# Altium PCB PCB_CONTROL.PcbDoc (part 10 of 15)
Units mil, origin at the board's own origin, x right, y up, seen from the top; angles counter-clockwise.
Board outline 7360.03 x 4773.15 mil, 2 copper layers (Top Layer, Bottom Layer); 73 components, 135 nets, 396 pads, 106 vias.
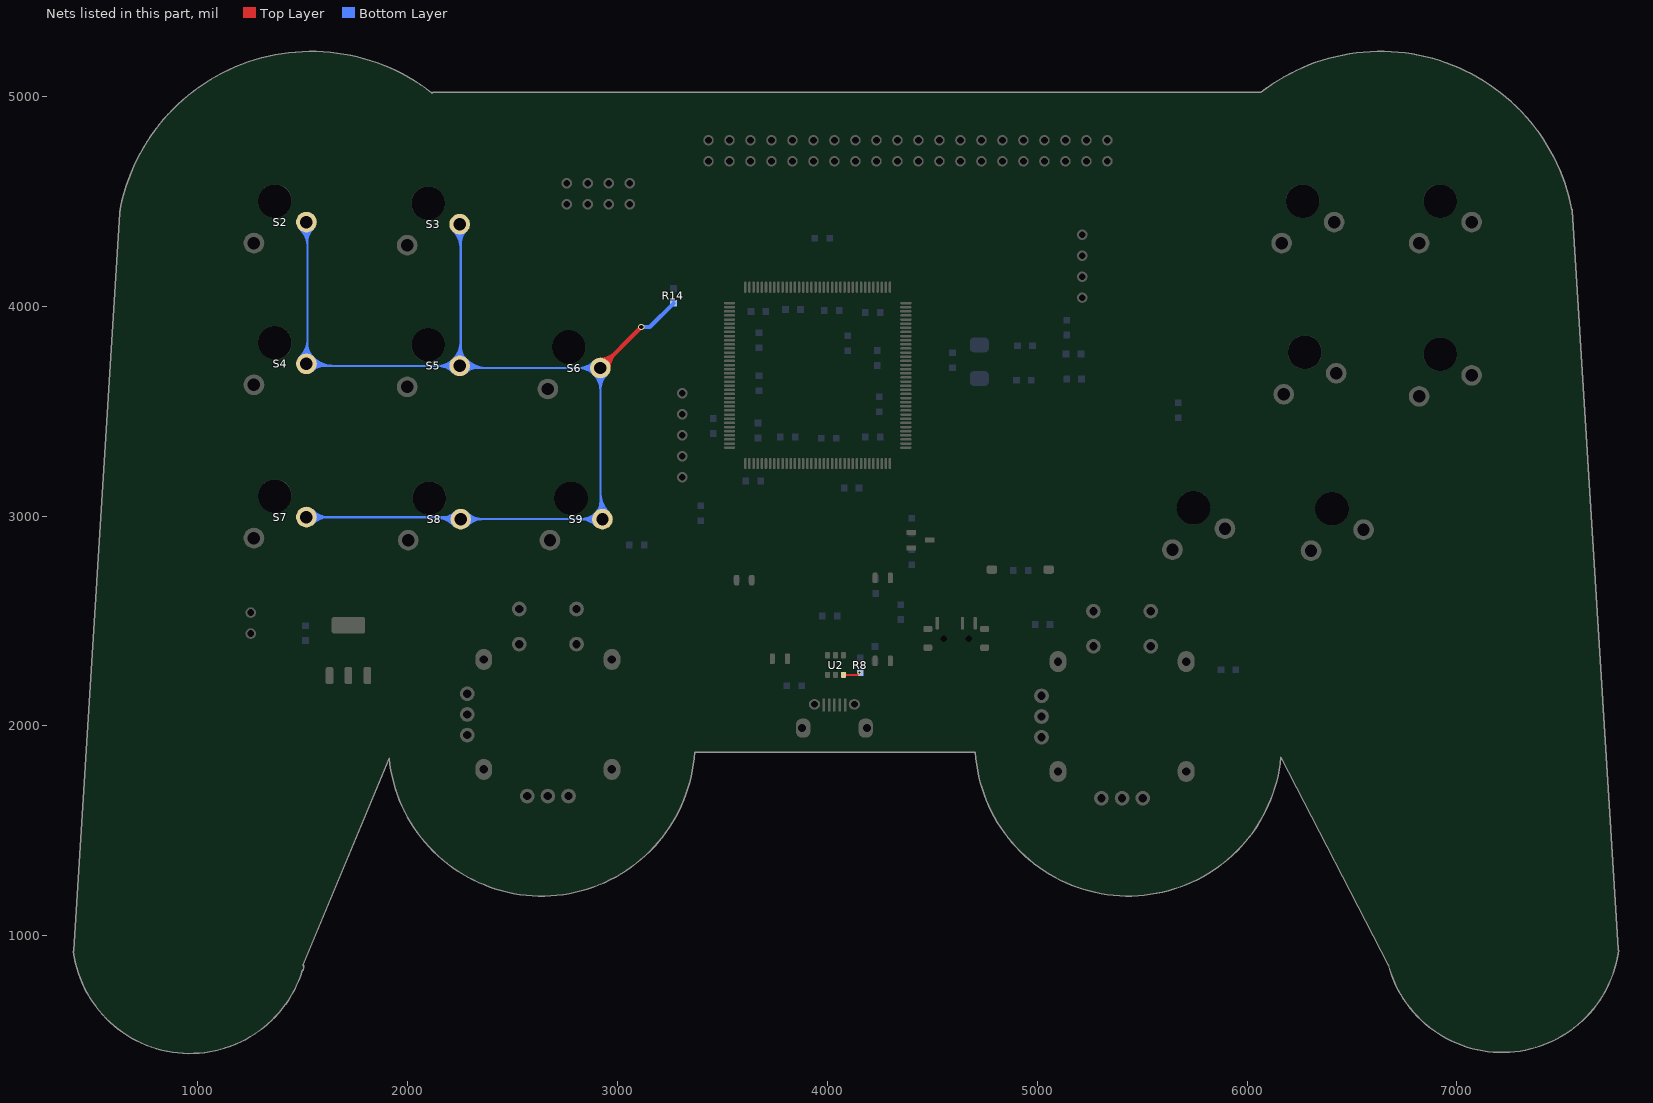
[diagram p10: the nets of this part, all layers, seen from the top]

## Via types
v1: diameter 20, hole 10, Top Layer to Bottom Layer, 104 vias
v2: diameter 30, hole 20, Top Layer to Bottom Layer, 2 vias

## Nets (pads, with @x,y where several pads share a name; then routed paths per layer and width w, separated by ;. In a path a pad name is that pad's centre, name@x,y a point inside that pad or via, vN(x,y) a via of type N, cw(c..) or ccw(c..) an arc to the next point about the centre after c; other vN are vias at no path point) (continued)
NetR8_1: R8.1 U2.6 | length 1735.2
  Top Layer w10: U2.6@4078,2243 4143,2243 ; U2.6@4078,2243 4090.53,2242.42 ; U2.6@4078,2243 4090.53,2243.58 ; U2.6@4078,2243 4090.53,2242.42 ; U2.6@4078,2243 4090.53,2243.58 ; U2.6@4082.95,2238.05 cw(c4094.9,2226.1) 4094.9,2243 ; U2.6@4082.95,2238.05 cw(c4094.9,2226.1) 4094.9,2243 ; U2.6@4082.95,2238.05 cw(c4094.9,2226.1) 4094.9,2243 ; U2.6@4082.95,2238.05 cw(c4094.9,2226.1) 4094.9,2243 ; U2.6@4082.95,2238.05 cw(c4094.9,2226.1) 4094.9,2243 ; U2.6@4082.95,2238.05 cw(c4094.9,2226.1) 4094.9,2243 ; U2.6@4082.95,2238.05 cw(c4094.9,2226.1) 4094.9,2243 ; U2.6@4082.95,2238.05 cw(c4094.9,2226.1) 4094.9,2243 ; U2.6@4082.95,2238.05 cw(c4094.9,2226.1) 4094.9,2243 ; U2.6@4082.95,2238.05 cw(c4094.9,2226.1) 4094.9,2243 ; U2.6@4082.95,2247.95 ccw(c4094.9,2259.9) 4094.9,2243 ; U2.6@4082.95,2247.95 ccw(c4094.9,2259.9) 4094.9,2243 ; U2.6@4082.95,2247.95 ccw(c4094.9,2259.9) 4094.9,2243 ; U2.6@4082.95,2247.95 ccw(c4094.9,2259.9) 4094.9,2243 ; U2.6@4082.95,2247.95 ccw(c4094.9,2259.9) 4094.9,2243 ; U2.6@4082.95,2247.95 ccw(c4094.9,2259.9) 4094.9,2243 ; U2.6@4082.95,2247.95 ccw(c4094.9,2259.9) 4094.9,2243 ; U2.6@4082.95,2247.95 ccw(c4094.9,2259.9) 4094.9,2243 ; U2.6@4082.95,2247.95 ccw(c4094.9,2259.9) 4094.9,2243 ; U2.6@4082.95,2247.95 ccw(c4094.9,2259.9) 4094.9,2243 ; U2.6@4083.78,2239.06 cw(c4090.17,2234.7) 4090.53,2242.42 ; U2.6@4083.78,2239.06 cw(c4090.17,2234.7) 4090.53,2242.42 ; U2.6@4083.78,2239.06 cw(c4090.17,2234.7) 4090.53,2242.42 ; U2.6@4083.78,2239.06 cw(c4090.17,2234.7) 4090.53,2242.42 ; U2.6@4083.78,2239.06 cw(c4090.17,2234.7) 4090.53,2242.42 ; U2.6@4083.78,2239.06 cw(c4090.17,2234.7) 4090.53,2242.42 ; U2.6@4083.78,2239.06 cw(c4090.17,2234.7) 4090.53,2242.42 ; U2.6@4083.78,2239.06 cw(c4090.17,2234.7) 4090.53,2242.42 ; U2.6@4083.78,2239.06 cw(c4090.17,2234.7) 4090.53,2242.42 ; U2.6@4083.78,2239.06 cw(c4090.17,2234.7) 4090.53,2242.42 ; U2.6@4083.78,2239.06 cw(c4090.17,2234.7) 4090.53,2242.42 ; U2.6@4083.78,2239.06 cw(c4090.17,2234.7) 4090.53,2242.42 ; U2.6@4083.78,2239.06 cw(c4090.17,2234.7) 4090.53,2242.42 ; U2.6@4083.78,2239.06 cw(c4090.17,2234.7) 4090.53,2242.42 ; U2.6@4083.78,2239.06 cw(c4090.17,2234.7) 4090.53,2242.42 ; U2.6@4083.78,2239.06 cw(c4090.17,2234.7) 4090.53,2242.42 ; U2.6@4083.78,2246.94 ccw(c4090.17,2251.3) 4090.53,2243.58 ; U2.6@4083.78,2246.94 ccw(c4090.17,2251.3) 4090.53,2243.58 ; U2.6@4083.78,2246.94 ccw(c4090.17,2251.3) 4090.53,2243.58 ; U2.6@4083.78,2246.94 ccw(c4090.17,2251.3) 4090.53,2243.58 ; U2.6@4083.78,2246.94 ccw(c4090.17,2251.3) 4090.53,2243.58 ; U2.6@4083.78,2246.94 ccw(c4090.17,2251.3) 4090.53,2243.58 ; U2.6@4083.78,2246.94 ccw(c4090.17,2251.3) 4090.53,2243.58 ; U2.6@4083.78,2246.94 ccw(c4090.17,2251.3) 4090.53,2243.58 ; U2.6@4083.78,2246.94 ccw(c4090.17,2251.3) 4090.53,2243.58 ; U2.6@4083.78,2246.94 ccw(c4090.17,2251.3) 4090.53,2243.58 ; U2.6@4083.78,2246.94 ccw(c4090.17,2251.3) 4090.53,2243.58 ; U2.6@4083.78,2246.94 ccw(c4090.17,2251.3) 4090.53,2243.58 ; U2.6@4083.78,2246.94 ccw(c4090.17,2251.3) 4090.53,2243.58 ; U2.6@4083.78,2246.94 ccw(c4090.17,2251.3) 4090.53,2243.58 ; U2.6@4083.78,2246.94 ccw(c4090.17,2251.3) 4090.53,2243.58 ; U2.6@4083.78,2246.94 ccw(c4090.17,2251.3) 4090.53,2243.58 ; U2.6@4084.12,2239.6 cw(c4090.88,2235.85) 4090.53,2243.58 ; U2.6@4084.12,2239.6 cw(c4090.88,2235.85) 4090.53,2243.58 ; U2.6@4084.12,2239.6 cw(c4090.88,2235.85) 4090.53,2243.58 ; U2.6@4084.12,2239.6 cw(c4090.88,2235.85) 4090.53,2243.58 ; U2.6@4084.12,2239.6 cw(c4090.88,2235.85) 4090.53,2243.58 ; U2.6@4084.12,2239.6 cw(c4090.88,2235.85) 4090.53,2243.58 ; U2.6@4084.12,2239.6 cw(c4090.88,2235.85) 4090.53,2243.58 ; U2.6@4084.12,2239.6 cw(c4090.88,2235.85) 4090.53,2243.58 ; U2.6@4084.12,2239.6 cw(c4090.88,2235.85) 4090.53,2243.58 ; U2.6@4084.12,2239.6 cw(c4090.88,2235.85) 4090.53,2243.58 ; U2.6@4084.12,2239.6 cw(c4090.88,2235.85) 4090.53,2243.58 ; U2.6@4084.12,2239.6 cw(c4090.88,2235.85) 4090.53,2243.58 ; U2.6@4084.12,2239.6 cw(c4090.88,2235.85) 4090.53,2243.58 ; U2.6@4084.12,2239.6 cw(c4090.88,2235.85) 4090.53,2243.58 ; U2.6@4084.12,2239.6 cw(c4090.88,2235.85) 4090.53,2243.58 ; U2.6@4084.12,2239.6 cw(c4090.88,2235.85) 4090.53,2243.58 ; U2.6@4084.12,2246.4 ccw(c4090.88,2250.15) 4090.53,2242.42 ; U2.6@4084.12,2246.4 ccw(c4090.88,2250.15) 4090.53,2242.42 ; U2.6@4084.12,2246.4 ccw(c4090.88,2250.15) 4090.53,2242.42 ; U2.6@4084.12,2246.4 ccw(c4090.88,2250.15) 4090.53,2242.42 ; U2.6@4084.12,2246.4 ccw(c4090.88,2250.15) 4090.53,2242.42 ; U2.6@4084.12,2246.4 ccw(c4090.88,2250.15) 4090.53,2242.42 ; U2.6@4084.12,2246.4 ccw(c4090.88,2250.15) 4090.53,2242.42 ; U2.6@4084.12,2246.4 ccw(c4090.88,2250.15) 4090.53,2242.42 ; U2.6@4084.12,2246.4 ccw(c4090.88,2250.15) 4090.53,2242.42 ; U2.6@4084.12,2246.4 ccw(c4090.88,2250.15) 4090.53,2242.42 ; U2.6@4084.12,2246.4 ccw(c4090.88,2250.15) 4090.53,2242.42 ; U2.6@4084.12,2246.4 ccw(c4090.88,2250.15) 4090.53,2242.42 ; U2.6@4084.12,2246.4 ccw(c4090.88,2250.15) 4090.53,2242.42 ; U2.6@4084.12,2246.4 ccw(c4090.88,2250.15) 4090.53,2242.42 ; U2.6@4084.12,2246.4 ccw(c4090.88,2250.15) 4090.53,2242.42 ; U2.6@4084.12,2246.4 ccw(c4090.88,2250.15) 4090.53,2242.42 ; 4090.53,2242.42 4080.26,2249.62 4090.53,2242.42 ; 4090.53,2242.42 4079.64,2236.2 4090.53,2242.42 ; 4090.53,2243.58 4079.64,2249.8 4090.53,2243.58 ; 4090.53,2243.58 4080.26,2236.38 4090.53,2243.58 ; 4143,2243 v1(4155,2255) ; 4143,2243 v1(4155,2255) ; 4143,2243 v1(4155,2255) ; 4143,2243 v1(4155,2255) ; 4146.46,2246.46 cw(c4155,2237.93) v1@4155,2250 ; 4146.46,2246.46 ccw(c4137.93,2255) v1@4150,2255 ; 4146.46,2246.46 cw(c4155,2237.93) v1@4155,2250 ; 4146.46,2246.46 ccw(c4137.93,2255) v1@4150,2255 ; 4146.46,2246.46 cw(c4155,2237.93) v1@4155,2250 ; 4146.46,2246.46 ccw(c4137.93,2255) v1@4150,2255 ; 4146.46,2246.46 cw(c4155,2237.93) v1@4155,2250 ; 4146.46,2246.46 ccw(c4137.93,2255) v1@4150,2255 ; 4146.46,2246.46 ccw(c4137.93,2255) v1@4150,2255 ; 4146.46,2246.46 cw(c4155,2237.93) v1@4155,2250 ; 4146.46,2246.46 ccw(c4137.93,2255) v1@4150,2255 ; 4146.46,2246.46 cw(c4155,2237.93) v1@4155,2250 ; 4146.46,2246.46 ccw(c4137.93,2255) v1@4150,2255 ; 4146.46,2246.46 cw(c4155,2237.93) v1@4155,2250 ; 4146.46,2246.46 ccw(c4137.93,2255) v1@4150,2255 ; 4146.46,2246.46 cw(c4155,2237.93) v1@4155,2250 ; 4146.46,2246.46 ccw(c4137.93,2255) v1@4150,2255 ; 4146.46,2246.46 cw(c4155,2237.93) v1@4155,2250 ; 4146.46,2246.46 ccw(c4137.93,2255) v1@4150,2255 ; 4146.46,2246.46 cw(c4155,2237.93) v1@4155,2250 ; 4146.46,2246.46 ccw(c4137.93,2255) v1@4150,2255 ; 4146.46,2246.46 cw(c4155,2237.93) v1@4155,2250 ; 4146.46,2246.46 ccw(c4137.93,2255) v1@4150,2255 ; 4146.46,2246.46 cw(c4155,2237.93) v1@4155,2250 ; 4146.46,2246.46 ccw(c4137.93,2255) v1@4150,2255 ; 4146.46,2246.46 cw(c4155,2237.93) v1@4155,2250 ; 4146.46,2246.46 ccw(c4137.93,2255) v1@4150,2255 ; 4146.46,2246.46 cw(c4155,2237.93) v1@4155,2250 ; 4146.46,2246.46 ccw(c4137.93,2255) v1@4150,2255 ; 4146.46,2246.46 cw(c4155,2237.93) v1@4155,2250 ; 4146.46,2246.46 ccw(c4137.93,2255) v1@4150,2255 ; 4146.46,2246.46 cw(c4155,2237.93) v1@4155,2250 ; 4146.46,2246.46 ccw(c4137.93,2255) v1@4150,2255 ; 4146.46,2246.46 cw(c4155,2237.93) v1@4155,2250 ; 4146.46,2246.46 ccw(c4137.93,2255) v1@4150,2255 ; 4146.46,2246.46 cw(c4155,2237.93) v1@4155,2250 ; 4146.46,2246.46 ccw(c4137.93,2255) v1@4150,2255 ; 4146.46,2246.46 cw(c4155,2237.93) v1@4155,2250 ; 4146.46,2246.46 ccw(c4137.93,2255) v1@4150,2255 ; 4146.46,2246.46 cw(c4155,2237.93) v1@4155,2250 ; 4146.46,2246.46 ccw(c4137.93,2255) v1@4150,2255 ; 4146.46,2246.46 cw(c4155,2237.93) v1@4155,2250 ; 4146.46,2246.46 ccw(c4137.93,2255) v1@4150,2255 ; 4146.46,2246.46 cw(c4155,2237.93) v1@4155,2250 ; 4146.46,2246.46 ccw(c4137.93,2255) v1@4150,2255 ; 4146.46,2246.46 cw(c4155,2237.93) v1@4155,2250 ; 4146.46,2246.46 ccw(c4137.93,2255) v1@4150,2255 ; 4146.46,2246.46 cw(c4155,2237.93) v1@4155,2250 ; 4146.46,2246.46 ccw(c4137.93,2255) v1@4150,2255 ; 4146.46,2246.46 cw(c4155,2237.93) v1@4155,2250 ; 4146.46,2246.46 ccw(c4137.93,2255) v1@4150,2255 ; 4146.46,2246.46 cw(c4155,2237.93) v1@4155,2250 ; 4146.46,2246.46 ccw(c4137.93,2255) v1@4150,2255 ; 4146.46,2246.46 cw(c4155,2237.93) v1@4155,2250 ; 4146.46,2246.46 ccw(c4137.93,2255) v1@4150,2255 ; 4146.46,2246.46 cw(c4155,2237.93) v1@4155,2250 ; 4146.46,2246.46 ccw(c4137.93,2255) v1@4150,2255 ; 4146.46,2246.46 cw(c4155,2237.93) v1@4155,2250 ; 4146.46,2246.46 ccw(c4137.93,2255) v1@4150,2255 ; 4146.46,2246.46 cw(c4155,2237.93) v1@4155,2250 ; 4146.46,2246.46 ccw(c4137.93,2255) v1@4150,2255 ; 4146.46,2246.46 cw(c4155,2237.93) v1@4155,2250 ; 4146.46,2246.46 ccw(c4137.93,2255) v1@4150,2255 ; 4146.46,2246.46 cw(c4155,2237.93) v1@4155,2250 ; 4146.46,2246.46 ccw(c4137.93,2255) v1@4150,2255 ; 4146.46,2246.46 cw(c4155,2237.93) v1@4155,2250 ; 4146.46,2246.46 ccw(c4137.93,2255) v1@4150,2255 ; 4146.46,2246.46 cw(c4155,2237.93) v1@4155,2250 ; 4146.46,2246.46 ccw(c4137.93,2255) v1@4150,2255 ; 4146.46,2246.46 cw(c4155,2237.93) v1@4155,2250 ; 4146.46,2246.46 ccw(c4137.93,2255) v1@4150,2255 ; 4146.46,2246.46 cw(c4155,2237.93) v1@4155,2250
NetR14_1: R14.1 S2.1 S3.1 S4.1 S5.1 S6.1 S7.1 S8.1 S9.1 | length 47335.3
  Top Layer w20: S6.1@2920,3705 v2(3115,3900) ; S6.1@2919.23,3705.16 cw(c2985.75,3691.54) 2968.17,3757.12 ; S6.1@2919.23,3705.16 cw(c2985.75,3691.54) 2968.17,3757.12 ; S6.1@2919.23,3705.16 cw(c2985.75,3691.54) 2968.17,3757.12 ; S6.1@2919.23,3705.16 cw(c2985.75,3691.54) 2968.17,3757.12 ; S6.1@2919.23,3705.16 cw(c2985.75,3691.54) 2968.17,3757.12 ; S6.1@2919.23,3705.16 cw(c2985.75,3691.54) 2968.17,3757.12 ; S6.1@2920,3744.21 ccw(c2920,3838.88) 2986.94,3771.94 ; S6.1@2920,3744.21 ccw(c2920,3838.88) 2986.94,3771.94 ; S6.1@2920,3744.21 ccw(c2920,3838.88) 2986.94,3771.94 ; S6.1@2920,3744.21 ccw(c2920,3838.88) 2986.94,3771.94 ; S6.1@2920.16,3704.23 ccw(c2906.54,3770.75) 2972.12,3753.17 ; S6.1@2920.16,3704.23 ccw(c2906.54,3770.75) 2972.12,3753.17 ; S6.1@2920.16,3704.23 ccw(c2906.54,3770.75) 2972.12,3753.17 ; S6.1@2920.16,3704.23 ccw(c2906.54,3770.75) 2972.12,3753.17 ; S6.1@2920.16,3704.23 ccw(c2906.54,3770.75) 2972.12,3753.17 ; S6.1@2920.16,3704.23 ccw(c2906.54,3770.75) 2972.12,3753.17 ; S6.1@2959.21,3705 cw(c3053.88,3705) 2986.94,3771.94 ; S6.1@2959.21,3705 cw(c3053.88,3705) 2986.94,3771.94 ; S6.1@2959.21,3705 cw(c3053.88,3705) 2986.94,3771.94 ; S6.1@2959.21,3705 cw(c3053.88,3705) 2986.94,3771.94
  Bottom Layer w10: S7.1@1521,2994 2246,2994 S8.1@2255,2985 S9.1@2930,2985 2920,2995 S6.1@2920,3705 S5.1@2260,3705 ; S4.1@1525,3725 S2.1@1525,4395 ; S4.1@1530,3715 S5.1@2250,3715 ; S5.1@2255,3715 S3.1@2255,4385 ; S4.1@1488.74,3756.26 ccw(c1401.19,3843.81) 1525,3843.81 ; S4.1@1488.74,3756.26 ccw(c1401.19,3843.81) 1525,3843.81 ; S4.1@1488.74,3756.26 ccw(c1401.19,3843.81) 1525,3843.81 ; S4.1@1488.74,3756.26 ccw(c1401.19,3843.81) 1525,3843.81 ; S4.1@1488.74,3756.26 ccw(c1401.19,3843.81) 1525,3843.81 ; S4.1@1488.74,3756.26 ccw(c1401.19,3843.81) 1525,3843.81 ; S4.1@1488.74,3756.26 ccw(c1401.19,3843.81) 1525,3843.81 ; S4.1@1488.74,3756.26 ccw(c1401.19,3843.81) 1525,3843.81 ; S2.1@1488.74,4368.74 cw(c1401.19,4281.19) 1525,4281.19 ; S2.1@1488.74,4368.74 cw(c1401.19,4281.19) 1525,4281.19 ; S2.1@1488.74,4368.74 cw(c1401.19,4281.19) 1525,4281.19 ; S2.1@1488.74,4368.74 cw(c1401.19,4281.19) 1525,4281.19 ; S2.1@1488.74,4368.74 cw(c1401.19,4281.19) 1525,4281.19 ; S2.1@1488.74,4368.74 cw(c1401.19,4281.19) 1525,4281.19 ; S2.1@1488.74,4368.74 cw(c1401.19,4281.19) 1525,4281.19 ; S2.1@1488.74,4368.74 cw(c1401.19,4281.19) 1525,4281.19 ; S4.1@1495.81,3749.19 ccw(c1425.33,3819.67) 1525,3819.67 ; S4.1@1495.81,3749.19 ccw(c1425.33,3819.67) 1525,3819.67 ; S4.1@1495.81,3749.19 ccw(c1425.33,3819.67) 1525,3819.67 ; S4.1@1495.81,3749.19 ccw(c1425.33,3819.67) 1525,3819.67 ; S4.1@1495.81,3749.19 ccw(c1425.33,3819.67) 1525,3819.67 ; S4.1@1495.81,3749.19 ccw(c1425.33,3819.67) 1525,3819.67 ; S4.1@1495.81,3749.19 ccw(c1425.33,3819.67) 1525,3819.67 ; S4.1@1495.81,3749.19 ccw(c1425.33,3819.67) 1525,3819.67 ; S2.1@1495.81,4375.81 cw(c1425.33,4305.33) 1525,4305.33 ; S2.1@1495.81,4375.81 cw(c1425.33,4305.33) 1525,4305.33 ; S2.1@1495.81,4375.81 cw(c1425.33,4305.33) 1525,4305.33 ; S2.1@1495.81,4375.81 cw(c1425.33,4305.33) 1525,4305.33 ; S2.1@1495.81,4375.81 cw(c1425.33,4305.33) 1525,4305.33 ; S2.1@1495.81,4375.81 cw(c1425.33,4305.33) 1525,4305.33 ; S2.1@1495.81,4375.81 cw(c1425.33,4305.33) 1525,4305.33 ; S2.1@1495.81,4375.81 cw(c1425.33,4305.33) 1525,4305.33 ; S4.1@1502.88,3742.12 ccw(c1449.47,3795.53) 1525,3795.53 ; S4.1@1502.88,3742.12 ccw(c1449.47,3795.53) 1525,3795.53 ; S4.1@1502.88,3742.12 ccw(c1449.47,3795.53) 1525,3795.53 ; S4.1@1502.88,3742.12 ccw(c1449.47,3795.53) 1525,3795.53 ; S4.1@1502.88,3742.12 ccw(c1449.47,3795.53) 1525,3795.53 ; S4.1@1502.88,3742.12 ccw(c1449.47,3795.53) 1525,3795.53 ; S4.1@1502.88,3742.12 ccw(c1449.47,3795.53) 1525,3795.53 ; S4.1@1502.88,3742.12 ccw(c1449.47,3795.53) 1525,3795.53 ; S2.1@1502.88,4382.88 cw(c1449.47,4329.47) 1525,4329.47 ; S2.1@1502.88,4382.88 cw(c1449.47,4329.47) 1525,4329.47 ; S2.1@1502.88,4382.88 cw(c1449.47,4329.47) 1525,4329.47 ; S2.1@1502.88,4382.88 cw(c1449.47,4329.47) 1525,4329.47 ; S2.1@1502.88,4382.88 cw(c1449.47,4329.47) 1525,4329.47 ; S2.1@1502.88,4382.88 cw(c1449.47,4329.47) 1525,4329.47 ; S2.1@1502.88,4382.88 cw(c1449.47,4329.47) 1525,4329.47 ; S2.1@1502.88,4382.88 cw(c1449.47,4329.47) 1525,4329.47 ; 1525,3795.53 ccw(c1590.53,3795.53) S4.1@1544.19,3749.19 ; 1525,3795.53 ccw(c1590.53,3795.53) S4.1@1544.19,3749.19 ; 1525,3795.53 ccw(c1590.53,3795.53) S4.1@1544.19,3749.19 ; 1525,3795.53 ccw(c1590.53,3795.53) S4.1@1544.19,3749.19 ; 1525,3795.53 ccw(c1590.53,3795.53) S4.1@1544.19,3749.19 ; 1525,3795.53 ccw(c1590.53,3795.53) S4.1@1544.19,3749.19 ; 1525,3795.53 ccw(c1590.53,3795.53) S4.1@1544.19,3749.19 ; 1525,3795.53 ccw(c1590.53,3795.53) S4.1@1544.19,3749.19 ; 1525,3819.67 ccw(c1614.67,3819.67) S4.1@1551.26,3756.26 ; 1525,3819.67 ccw(c1614.67,3819.67) S4.1@1551.26,3756.26 ; 1525,3819.67 ccw(c1614.67,3819.67) S4.1@1551.26,3756.26 ; 1525,3819.67 ccw(c1614.67,3819.67) S4.1@1551.26,3756.26 ; 1525,3819.67 ccw(c1614.67,3819.67) S4.1@1551.26,3756.26 ; 1525,3819.67 ccw(c1614.67,3819.67) S4.1@1551.26,3756.26 ; 1525,3819.67 ccw(c1614.67,3819.67) S4.1@1551.26,3756.26 ; 1525,3819.67 ccw(c1614.67,3819.67) S4.1@1551.26,3756.26 ; 1525,4305.33 cw(c1614.67,4305.33) S2.1@1551.26,4368.74 ; 1525,4305.33 cw(c1614.67,4305.33) S2.1@1551.26,4368.74 ; 1525,4305.33 cw(c1614.67,4305.33) S2.1@1551.26,4368.74 ; 1525,4305.33 cw(c1614.67,4305.33) S2.1@1551.26,4368.74 ; 1525,4305.33 cw(c1614.67,4305.33) S2.1@1551.26,4368.74 ; 1525,4305.33 cw(c1614.67,4305.33) S2.1@1551.26,4368.74 ; 1525,4305.33 cw(c1614.67,4305.33) S2.1@1551.26,4368.74 ; 1525,4305.33 cw(c1614.67,4305.33) S2.1@1551.26,4368.74 ; 1525,4329.47 cw(c1590.53,4329.47) S2.1@1544.19,4375.81 ; 1525,4329.47 cw(c1590.53,4329.47) S2.1@1544.19,4375.81 ; 1525,4329.47 cw(c1590.53,4329.47) S2.1@1544.19,4375.81 ; 1525,4329.47 cw(c1590.53,4329.47) S2.1@1544.19,4375.81 ; 1525,4329.47 cw(c1590.53,4329.47) S2.1@1544.19,4375.81 ; 1525,4329.47 cw(c1590.53,4329.47) S2.1@1544.19,4375.81 ; 1525,4329.47 cw(c1590.53,4329.47) S2.1@1544.19,4375.81 ; 1525,4329.47 cw(c1590.53,4329.47) S2.1@1544.19,4375.81 ; S4.1@1530.05,3735.05 ccw(c1578.45,3783.45) 1578.45,3715 ; S4.1@1530.05,3735.05 ccw(c1578.45,3783.45) 1578.45,3715 ; S4.1@1530.05,3735.05 ccw(c1578.45,3783.45) 1578.45,3715 ; S4.1@1530.05,3735.05 ccw(c1578.45,3783.45) 1578.45,3715 ; S4.1@1530.05,3735.05 ccw(c1578.45,3783.45) 1578.45,3715 ; S4.1@1530.05,3735.05 ccw(c1578.45,3783.45) 1578.45,3715 ; S4.1@1530.05,3735.05 ccw(c1578.45,3783.45) 1578.45,3715 ; S4.1@1530.05,3735.05 ccw(c1578.45,3783.45) 1578.45,3715 ; S7.1@1537.12,2977.88 cw(c1576.04,2938.96) 1576.04,2994 ; S7.1@1537.12,2977.88 cw(c1576.04,2938.96) 1576.04,2994 ; S7.1@1537.12,2977.88 cw(c1576.04,2938.96) 1576.04,2994 ; S7.1@1537.12,2977.88 cw(c1576.04,2938.96) 1576.04,2994 ; S7.1@1537.12,2977.88 cw(c1576.04,2938.96) 1576.04,2994 ; S7.1@1537.12,2977.88 cw(c1576.04,2938.96) 1576.04,2994 ; S7.1@1537.12,2977.88 cw(c1576.04,2938.96) 1576.04,2994 ; S7.1@1537.12,2977.88 cw(c1576.04,2938.96) 1576.04,2994 ; S7.1@1537.12,3012.12 ccw(c1580.87,3055.87) 1580.87,2994 ; S7.1@1537.12,3012.12 ccw(c1580.87,3055.87) 1580.87,2994 ; S7.1@1537.12,3012.12 ccw(c1580.87,3055.87) 1580.87,2994 ; S7.1@1537.12,3012.12 ccw(c1580.87,3055.87) 1580.87,2994 ; S7.1@1537.12,3012.12 ccw(c1580.87,3055.87) 1580.87,2994 ; S7.1@1537.12,3012.12 ccw(c1580.87,3055.87) 1580.87,2994 ; S7.1@1537.12,3012.12 ccw(c1580.87,3055.87) 1580.87,2994 ; S7.1@1537.12,3012.12 ccw(c1580.87,3055.87) 1580.87,2994 ; S4.1@1537.12,3742.12 ccw(c1602.6,3807.6) 1602.6,3715 ; S4.1@1537.12,3742.12 ccw(c1602.6,3807.6) 1602.6,3715 ; S4.1@1537.12,3742.12 ccw(c1602.6,3807.6) 1602.6,3715 ; S4.1@1537.12,3742.12 ccw(c1602.6,3807.6) 1602.6,3715 ; S4.1@1537.12,3742.12 ccw(c1602.6,3807.6) 1602.6,3715 ; S4.1@1537.12,3742.12 ccw(c1602.6,3807.6) 1602.6,3715 ; S4.1@1537.12,3742.12 ccw(c1602.6,3807.6) 1602.6,3715 ; S4.1@1537.12,3742.12 ccw(c1602.6,3807.6) 1602.6,3715 ; S7.1@1544.19,2970.81 cw(c1600.18,2914.82) 1600.18,2994 ; S7.1@1544.19,2970.81 cw(c1600.18,2914.82) 1600.18,2994 ; S7.1@1544.19,2970.81 cw(c1600.18,2914.82) 1600.18,2994 ; S7.1@1544.19,2970.81 cw(c1600.18,2914.82) 1600.18,2994 ; S7.1@1544.19,2970.81 cw(c1600.18,2914.82) 1600.18,2994 ; S7.1@1544.19,2970.81 cw(c1600.18,2914.82) 1600.18,2994 ; S7.1@1544.19,2970.81 cw(c1600.18,2914.82) 1600.18,2994 ; S7.1@1544.19,2970.81 cw(c1600.18,2914.82) 1600.18,2994 ; S7.1@1544.19,3019.19 ccw(c1605.01,3080.01) 1605.01,2994 ; S7.1@1544.19,3019.19 ccw(c1605.01,3080.01) 1605.01,2994 ; S7.1@1544.19,3019.19 ccw(c1605.01,3080.01) 1605.01,2994 ; S7.1@1544.19,3019.19 ccw(c1605.01,3080.01) 1605.01,2994 ; S7.1@1544.19,3019.19 ccw(c1605.01,3080.01) 1605.01,2994 ; S7.1@1544.19,3019.19 ccw(c1605.01,3080.01) 1605.01,2994 ; S7.1@1544.19,3019.19 ccw(c1605.01,3080.01) 1605.01,2994 ; S7.1@1544.19,3019.19 ccw(c1605.01,3080.01) 1605.01,2994 ; S4.1@1544.19,3700.81 cw(c1578.45,3666.55) 1578.45,3715 ; S4.1@1544.19,3700.81 cw(c1578.45,3666.55) 1578.45,3715 ; S4.1@1544.19,3700.81 cw(c1578.45,3666.55) 1578.45,3715 ; S4.1@1544.19,3700.81 cw(c1578.45,3666.55) 1578.45,3715 ; S4.1@1544.19,3700.81 cw(c1578.45,3666.55) 1578.45,3715 ; S4.1@1544.19,3700.81 cw(c1578.45,3666.55) 1578.45,3715 ; S4.1@1544.19,3700.81 cw(c1578.45,3666.55) 1578.45,3715 ; S4.1@1544.19,3700.81 cw(c1578.45,3666.55) 1578.45,3715 ; S4.1@1544.19,3749.19 ccw(c1626.74,3831.74) 1626.74,3715 ; S4.1@1544.19,3749.19 ccw(c1626.74,3831.74) 1626.74,3715 ; S4.1@1544.19,3749.19 ccw(c1626.74,3831.74) 1626.74,3715 ; S4.1@1544.19,3749.19 ccw(c1626.74,3831.74) 1626.74,3715 ; S4.1@1544.19,3749.19 ccw(c1626.74,3831.74) 1626.74,3715 ; S4.1@1544.19,3749.19 ccw(c1626.74,3831.74) 1626.74,3715 ; S4.1@1544.19,3749.19 ccw(c1626.74,3831.74) 1626.74,3715 ; S4.1@1544.19,3749.19 ccw(c1626.74,3831.74) 1626.74,3715 ; S7.1@1551.26,2963.74 cw(c1624.32,2890.68) 1624.32,2994 ; S7.1@1551.26,2963.74 cw(c1624.32,2890.68) 1624.32,2994 ; S7.1@1551.26,2963.74 cw(c1624.32,2890.68) 1624.32,2994 ; S7.1@1551.26,2963.74 cw(c1624.32,2890.68) 1624.32,2994 ; S7.1@1551.26,2963.74 cw(c1624.32,2890.68) 1624.32,2994 ; S7.1@1551.26,2963.74 cw(c1624.32,2890.68) 1624.32,2994 ; S7.1@1551.26,2963.74 cw(c1624.32,2890.68) 1624.32,2994 ; S7.1@1551.26,2963.74 cw(c1624.32,2890.68) 1624.32,2994 ; S7.1@1551.26,3026.26 ccw(c1629.15,3104.15) 1629.15,2994 ; S7.1@1551.26,3026.26 ccw(c1629.15,3104.15) 1629.15,2994 ; S7.1@1551.26,3026.26 ccw(c1629.15,3104.15) 1629.15,2994 ; S7.1@1551.26,3026.26 ccw(c1629.15,3104.15) 1629.15,2994 ; S7.1@1551.26,3026.26 ccw(c1629.15,3104.15) 1629.15,2994 ; S7.1@1551.26,3026.26 ccw(c1629.15,3104.15) 1629.15,2994 ; S7.1@1551.26,3026.26 ccw(c1629.15,3104.15) 1629.15,2994 ; S7.1@1551.26,3026.26 ccw(c1629.15,3104.15) 1629.15,2994 ; S4.1@1551.26,3693.74 cw(c1602.6,3642.4) 1602.6,3715 ; S4.1@1551.26,3693.74 cw(c1602.6,3642.4) 1602.6,3715 ; S4.1@1551.26,3693.74 cw(c1602.6,3642.4) 1602.6,3715 ; S4.1@1551.26,3693.74 cw(c1602.6,3642.4) 1602.6,3715 ; S4.1@1551.26,3693.74 cw(c1602.6,3642.4) 1602.6,3715 ; S4.1@1551.26,3693.74 cw(c1602.6,3642.4) 1602.6,3715 ; S4.1@1551.26,3693.74 cw(c1602.6,3642.4) 1602.6,3715 ; S4.1@1551.26,3693.74 cw(c1602.6,3642.4) 1602.6,3715 ; S4.1@1551.26,3756.26 ccw(c1650.88,3855.88) 1650.88,3715 ; S4.1@1551.26,3756.26 ccw(c1650.88,3855.88) 1650.88,3715 ; S4.1@1551.26,3756.26 ccw(c1650.88,3855.88) 1650.88,3715 ; S4.1@1551.26,3756.26 ccw(c1650.88,3855.88) 1650.88,3715 ; S4.1@1551.26,3756.26 ccw(c1650.88,3855.88) 1650.88,3715 ; S4.1@1551.26,3756.26 ccw(c1650.88,3855.88) 1650.88,3715 ; S4.1@1551.26,3756.26 ccw(c1650.88,3855.88) 1650.88,3715 ; S4.1@1551.26,3756.26 ccw(c1650.88,3855.88) 1650.88,3715 ; 2126.53,2994 cw(c2126.53,2856.53) S8.1@2223.74,2953.74 ; 2126.53,2994 cw(c2126.53,2856.53) S8.1@2223.74,2953.74 ; 2126.53,2994 cw(c2126.53,2856.53) S8.1@2223.74,2953.74 ; 2126.53,2994 cw(c2126.53,2856.53) S8.1@2223.74,2953.74 ; 2126.53,2994 cw(c2126.53,2856.53) S8.1@2223.74,2953.74 ; 2126.53,2994 cw(c2126.53,2856.53) S8.1@2223.74,2953.74 ; 2126.53,2994 cw(c2126.53,2856.53) S8.1@2223.74,2953.74 ; 2126.53,2994 cw(c2126.53,2856.53) S8.1@2223.74,2953.74 ; 2143.26,3715 cw(c2143.26,3608.26) S5.1@2218.74,3683.74 ; 2143.26,3715 ccw(c2143.26,3821.74) S5.1@2218.74,3746.26 ; 2143.26,3715 ccw(c2143.26,3821.74) S5.1@2218.74,3746.26 ; 2143.26,3715 cw(c2143.26,3608.26) S5.1@2218.74,3683.74 ; 2143.26,3715 ccw(c2143.26,3821.74) S5.1@2218.74,3746.26 ; 2143.26,3715 cw(c2143.26,3608.26) S5.1@2218.74,3683.74 ; 2143.26,3715 ccw(c2143.26,3821.74) S5.1@2218.74,3746.26 ; 2143.26,3715 cw(c2143.26,3608.26) S5.1@2218.74,3683.74 ; 2143.26,3715 ccw(c2143.26,3821.74) S5.1@2218.74,3746.26 ; 2143.26,3715 cw(c2143.26,3608.26) S5.1@2218.74,3683.74 ; 2143.26,3715 ccw(c2143.26,3821.74) S5.1@2218.74,3746.26 ; 2143.26,3715 cw(c2143.26,3608.26) S5.1@2218.74,3683.74 ; 2143.26,3715 ccw(c2143.26,3821.74) S5.1@2218.74,3746.26 ; 2143.26,3715 cw(c2143.26,3608.26) S5.1@2218.74,3683.74 ; 2143.26,3715 ccw(c2143.26,3821.74) S5.1@2218.74,3746.26 ; 2143.26,3715 cw(c2143.26,3608.26) S5.1@2218.74,3683.74 ; 2150.68,2994 cw(c2150.68,2880.68) S8.1@2230.81,2960.81 ; 2150.68,2994 cw(c2150.68,2880.68) S8.1@2230.81,2960.81 ; 2150.68,2994 cw(c2150.68,2880.68) S8.1@2230.81,2960.81 ; 2150.68,2994 cw(c2150.68,2880.68) S8.1@2230.81,2960.81 ; 2150.68,2994 cw(c2150.68,2880.68) S8.1@2230.81,2960.81 ; 2150.68,2994 cw(c2150.68,2880.68) S8.1@2230.81,2960.81 ; 2150.68,2994 cw(c2150.68,2880.68) S8.1@2230.81,2960.81 ; 2150.68,2994 cw(c2150.68,2880.68) S8.1@2230.81,2960.81 ; 2167.4,3715 cw(c2167.4,3632.4) S5.1@2225.81,3690.81 ; 2167.4,3715 ccw(c2167.4,3797.6) S5.1@2225.81,3739.19 ; 2167.4,3715 ccw(c2167.4,3797.6) S5.1@2225.81,3739.19 ; 2167.4,3715 cw(c2167.4,3632.4) S5.1@2225.81,3690.81 ; 2167.4,3715 ccw(c2167.4,3797.6) S5.1@2225.81,3739.19 ; 2167.4,3715 cw(c2167.4,3632.4) S5.1@2225.81,3690.81 ; 2167.4,3715 ccw(c2167.4,3797.6) S5.1@2225.81,3739.19 ; 2167.4,3715 cw(c2167.4,3632.4) S5.1@2225.81,3690.81 ; 2167.4,3715 ccw(c2167.4,3797.6) S5.1@2225.81,3739.19 ; 2167.4,3715 cw(c2167.4,3632.4) S5.1@2225.81,3690.81 ; 2167.4,3715 ccw(c2167.4,3797.6) S5.1@2225.81,3739.19 ; 2167.4,3715 cw(c2167.4,3632.4) S5.1@2225.81,3690.81 ; 2167.4,3715 ccw(c2167.4,3797.6) S5.1@2225.81,3739.19 ; 2167.4,3715 cw(c2167.4,3632.4) S5.1@2225.81,3690.81 ; 2167.4,3715 ccw(c2167.4,3797.6) S5.1@2225.81,3739.19 ; 2167.4,3715 cw(c2167.4,3632.4) S5.1@2225.81,3690.81 ; 2169.99,2994 ccw(c2169.99,3070.01) S8.1@2223.74,3016.26 ; 2169.99,2994 ccw(c2169.99,3070.01) S8.1@2223.74,3016.26 ; 2169.99,2994 ccw(c2169.99,3070.01) S8.1@2223.74,3016.26 ; 2169.99,2994 ccw(c2169.99,3070.01) S8.1@2223.74,3016.26 ; 2169.99,2994 ccw(c2169.99,3070.01) S8.1@2223.74,3016.26 ; 2169.99,2994 ccw(c2169.99,3070.01) S8.1@2223.74,3016.26 ; 2169.99,2994 ccw(c2169.99,3070.01) S8.1@2223.74,3016.26 ; 2169.99,2994 ccw(c2169.99,3070.01) S8.1@2223.74,3016.26 ; 2174.82,2994 cw(c2174.82,2904.82) S8.1@2237.88,2967.88 ; 2174.82,2994 cw(c2174.82,2904.82) S8.1@2237.88,2967.88 ; 2174.82,2994 cw(c2174.82,2904.82) S8.1@2237.88,2967.88 ; 2174.82,2994 cw(c2174.82,2904.82) S8.1@2237.88,2967.88 ; 2174.82,2994 cw(c2174.82,2904.82) S8.1@2237.88,2967.88 ; 2174.82,2994 cw(c2174.82,2904.82) S8.1@2237.88,2967.88 ; 2174.82,2994 cw(c2174.82,2904.82) S8.1@2237.88,2967.88 ; 2174.82,2994 cw(c2174.82,2904.82) S8.1@2237.88,2967.88 ; 2191.55,3715 cw(c2191.55,3656.55) S5.1@2232.88,3697.88 ; 2191.55,3715 ccw(c2191.55,3773.45) S5.1@2232.88,3732.12 ; 2191.55,3715 ccw(c2191.55,3773.45) S5.1@2232.88,3732.12 ; 2191.55,3715 cw(c2191.55,3656.55) S5.1@2232.88,3697.88 ; 2191.55,3715 ccw(c2191.55,3773.45) S5.1@2232.88,3732.12 ; 2191.55,3715 cw(c2191.55,3656.55) S5.1@2232.88,3697.88 ; 2191.55,3715 ccw(c2191.55,3773.45) S5.1@2232.88,3732.12 ; 2191.55,3715 cw(c2191.55,3656.55) S5.1@2232.88,3697.88 ; 2191.55,3715 ccw(c2191.55,3773.45) S5.1@2232.88,3732.12 ; 2191.55,3715 cw(c2191.55,3656.55) S5.1@2232.88,3697.88 ; 2191.55,3715 ccw(c2191.55,3773.45) S5.1@2232.88,3732.12 ; 2191.55,3715 cw(c2191.55,3656.55) S5.1@2232.88,3697.88 ; 2191.55,3715 ccw(c2191.55,3773.45) S5.1@2232.88,3732.12 ; 2191.55,3715 cw(c2191.55,3656.55) S5.1@2232.88,3697.88 ; 2191.55,3715 ccw(c2191.55,3773.45) S5.1@2232.88,3732.12 ; 2191.55,3715 cw(c2191.55,3656.55) S5.1@2232.88,3697.88 ; 2194.13,2994 ccw(c2194.13,3045.87) S8.1@2230.81,3009.19 ; 2194.13,2994 ccw(c2194.13,3045.87) S8.1@2230.81,3009.19 ; 2194.13,2994 ccw(c2194.13,3045.87) S8.1@2230.81,3009.19 ; 2194.13,2994 ccw(c2194.13,3045.87) S8.1@2230.81,3009.19 ; 2194.13,2994 ccw(c2194.13,3045.87) S8.1@2230.81,3009.19 ; 2194.13,2994 ccw(c2194.13,3045.87) S8.1@2230.81,3009.19 ; 2194.13,2994 ccw(c2194.13,3045.87) S8.1@2230.81,3009.19 ; 2194.13,2994 ccw(c2194.13,3045.87) S8.1@2230.81,3009.19 ; 2198.96,2994 cw(c2198.96,2928.96) S8.1@2244.95,2974.95 ; 2198.96,2994 cw(c2198.96,2928.96) S8.1@2244.95,2974.95 ; 2198.96,2994 cw(c2198.96,2928.96) S8.1@2244.95,2974.95 ; 2198.96,2994 cw(c2198.96,2928.96) S8.1@2244.95,2974.95 ; 2198.96,2994 cw(c2198.96,2928.96) S8.1@2244.95,2974.95 ; 2198.96,2994 cw(c2198.96,2928.96) S8.1@2244.95,2974.95 ; 2198.96,2994 cw(c2198.96,2928.96) S8.1@2244.95,2974.95 ; 2198.96,2994 cw(c2198.96,2928.96) S8.1@2244.95,2974.95 ; S5.1@2218.74,3746.26 ccw(c2131.19,3833.81) 2255,3833.81 ; S5.1@2218.74,3746.26 ccw(c2131.19,3833.81) 2255,3833.81 ; S5.1@2218.74,3746.26 ccw(c2131.19,3833.81) 2255,3833.81 ; S5.1@2218.74,3746.26 ccw(c2131.19,3833.81) 2255,3833.81 ; S5.1@2218.74,3746.26 ccw(c2131.19,3833.81) 2255,3833.81 ; S5.1@2218.74,3746.26 ccw(c2131.19,3833.81) 2255,3833.81 ; S5.1@2218.74,3746.26 ccw(c2131.19,3833.81) 2255,3833.81 ; S5.1@2218.74,3746.26 ccw(c2131.19,3833.81) 2255,3833.81 ; S3.1@2218.74,4358.74 cw(c2131.19,4271.19) 2255,4271.19 ; S3.1@2218.74,4358.74 cw(c2131.19,4271.19) 2255,4271.19 ; S3.1@2218.74,4358.74 cw(c2131.19,4271.19) 2255,4271.19 ; S3.1@2218.74,4358.74 cw(c2131.19,4271.19) 2255,4271.19 ; S3.1@2218.74,4358.74 cw(c2131.19,4271.19) 2255,4271.19 ; S3.1@2218.74,4358.74 cw(c2131.19,4271.19) 2255,4271.19 ; S3.1@2218.74,4358.74 cw(c2131.19,4271.19) 2255,4271.19 ; S3.1@2218.74,4358.74 cw(c2131.19,4271.19) 2255,4271.19 ; S5.1@2225.81,3739.19 ccw(c2155.33,3809.67) 2255,3809.67 ; S5.1@2225.81,3739.19 ccw(c2155.33,3809.67) 2255,3809.67 ; S5.1@2225.81,3739.19 ccw(c2155.33,3809.67) 2255,3809.67 ; S5.1@2225.81,3739.19 ccw(c2155.33,3809.67) 2255,3809.67 ; S5.1@2225.81,3739.19 ccw(c2155.33,3809.67) 2255,3809.67 ; S5.1@2225.81,3739.19 ccw(c2155.33,3809.67) 2255,3809.67 ; S5.1@2225.81,3739.19 ccw(c2155.33,3809.67) 2255,3809.67 ; S5.1@2225.81,3739.19 ccw(c2155.33,3809.67) 2255,3809.67 ; S3.1@2225.81,4365.81 cw(c2155.33,4295.33) 2255,4295.33 ; S3.1@2225.81,4365.81 cw(c2155.33,4295.33) 2255,4295.33 ; S3.1@2225.81,4365.81 cw(c2155.33,4295.33) 2255,4295.33 ; S3.1@2225.81,4365.81 cw(c2155.33,4295.33) 2255,4295.33 ; S3.1@2225.81,4365.81 cw(c2155.33,4295.33) 2255,4295.33 ; S3.1@2225.81,4365.81 cw(c2155.33,4295.33) 2255,4295.33 ; S3.1@2225.81,4365.81 cw(c2155.33,4295.33) 2255,4295.33 ; S3.1@2225.81,4365.81 cw(c2155.33,4295.33) 2255,4295.33 ; S5.1@2232.88,3732.12 ccw(c2179.47,3785.53) 2255,3785.53 ; S5.1@2232.88,3732.12 ccw(c2179.47,3785.53) 2255,3785.53 ; S5.1@2232.88,3732.12 ccw(c2179.47,3785.53) 2255,3785.53 ; S5.1@2232.88,3732.12 ccw(c2179.47,3785.53) 2255,3785.53 ; S5.1@2232.88,3732.12 ccw(c2179.47,3785.53) 2255,3785.53 ; S5.1@2232.88,3732.12 ccw(c2179.47,3785.53) 2255,3785.53 ; S5.1@2232.88,3732.12 ccw(c2179.47,3785.53) 2255,3785.53 ; S5.1@2232.88,3732.12 ccw(c2179.47,3785.53) 2255,3785.53 ; S3.1@2232.88,4372.88 cw(c2179.47,4319.47) 2255,4319.47 ; S3.1@2232.88,4372.88 cw(c2179.47,4319.47) 2255,4319.47 ; S3.1@2232.88,4372.88 cw(c2179.47,4319.47) 2255,4319.47 ; S3.1@2232.88,4372.88 cw(c2179.47,4319.47) 2255,4319.47 ; S3.1@2232.88,4372.88 cw(c2179.47,4319.47) 2255,4319.47 ; S3.1@2232.88,4372.88 cw(c2179.47,4319.47) 2255,4319.47 ; S3.1@2232.88,4372.88 cw(c2179.47,4319.47) 2255,4319.47 ; S3.1@2232.88,4372.88 cw(c2179.47,4319.47) 2255,4319.47 ; 2255,3785.53 ccw(c2320.53,3785.53) S5.1@2274.19,3739.19 ; 2255,3785.53 ccw(c2320.53,3785.53) S5.1@2274.19,3739.19 ; 2255,3785.53 ccw(c2320.53,3785.53) S5.1@2274.19,3739.19 ; 2255,3785.53 ccw(c2320.53,3785.53) S5.1@2274.19,3739.19 ; 2255,3785.53 ccw(c2320.53,3785.53) S5.1@2274.19,3739.19 ; 2255,3785.53 ccw(c2320.53,3785.53) S5.1@2274.19,3739.19 ; 2255,3785.53 ccw(c2320.53,3785.53) S5.1@2274.19,3739.19 ; 2255,3785.53 ccw(c2320.53,3785.53) S5.1@2274.19,3739.19 ; 2255,3809.67 ccw(c2344.67,3809.67) S5.1@2281.26,3746.26 ; 2255,3809.67 ccw(c2344.67,3809.67) S5.1@2281.26,3746.26 ; 2255,3809.67 ccw(c2344.67,3809.67) S5.1@2281.26,3746.26 ; 2255,3809.67 ccw(c2344.67,3809.67) S5.1@2281.26,3746.26 ; 2255,3809.67 ccw(c2344.67,3809.67) S5.1@2281.26,3746.26 ; 2255,3809.67 ccw(c2344.67,3809.67) S5.1@2281.26,3746.26 ; 2255,3809.67 ccw(c2344.67,3809.67) S5.1@2281.26,3746.26 ; 2255,3809.67 ccw(c2344.67,3809.67) S5.1@2281.26,3746.26 ; 2255,4295.33 cw(c2344.67,4295.33) S3.1@2281.26,4358.74 ; 2255,4295.33 cw(c2344.67,4295.33) S3.1@2281.26,4358.74 ; 2255,4295.33 cw(c2344.67,4295.33) S3.1@2281.26,4358.74 ; 2255,4295.33 cw(c2344.67,4295.33) S3.1@2281.26,4358.74 ; 2255,4295.33 cw(c2344.67,4295.33) S3.1@2281.26,4358.74 ; 2255,4295.33 cw(c2344.67,4295.33) S3.1@2281.26,4358.74 ; 2255,4295.33 cw(c2344.67,4295.33) S3.1@2281.26,4358.74 ; 2255,4295.33 cw(c2344.67,4295.33) S3.1@2281.26,4358.74 ; 2255,4319.47 cw(c2320.53,4319.47) S3.1@2274.19,4365.81 ; 2255,4319.47 cw(c2320.53,4319.47) S3.1@2274.19,4365.81 ; 2255,4319.47 cw(c2320.53,4319.47) S3.1@2274.19,4365.81 ; 2255,4319.47 cw(c2320.53,4319.47) S3.1@2274.19,4365.81 ; 2255,4319.47 cw(c2320.53,4319.47) S3.1@2274.19,4365.81 ; 2255,4319.47 cw(c2320.53,4319.47) S3.1@2274.19,4365.81 ; 2255,4319.47 cw(c2320.53,4319.47) S3.1@2274.19,4365.81 ; 2255,4319.47 cw(c2320.53,4319.47) S3.1@2274.19,4365.81 ; S5.1@2260.05,3725.05 ccw(c2308.45,3773.45) 2308.45,3705 ; S5.1@2260.05,3725.05 ccw(c2308.45,3773.45) 2308.45,3705 ; S5.1@2260.05,3725.05 ccw(c2308.45,3773.45) 2308.45,3705 ; S5.1@2260.05,3725.05 ccw(c2308.45,3773.45) 2308.45,3705 ; S5.1@2260.05,3725.05 ccw(c2308.45,3773.45) 2308.45,3705 ; S5.1@2260.05,3725.05 ccw(c2308.45,3773.45) 2308.45,3705 ; S5.1@2260.05,3725.05 ccw(c2308.45,3773.45) 2308.45,3705 ; S5.1@2260.05,3725.05 ccw(c2308.45,3773.45) 2308.45,3705 ; S5.1@2267.12,3732.12 ccw(c2332.6,3797.6) 2332.6,3705 ; S5.1@2267.12,3732.12 ccw(c2332.6,3797.6) 2332.6,3705 ; S5.1@2267.12,3732.12 ccw(c2332.6,3797.6) 2332.6,3705 ; S5.1@2267.12,3732.12 ccw(c2332.6,3797.6) 2332.6,3705 ; S5.1@2267.12,3732.12 ccw(c2332.6,3797.6) 2332.6,3705 ; S5.1@2267.12,3732.12 ccw(c2332.6,3797.6) 2332.6,3705 ; S5.1@2267.12,3732.12 ccw(c2332.6,3797.6) 2332.6,3705 ; S5.1@2267.12,3732.12 ccw(c2332.6,3797.6) 2332.6,3705 ; S8.1@2272.12,2967.88 cw(c2313.45,2926.55) 2313.45,2985 ; S8.1@2272.12,2967.88 cw(c2313.45,2926.55) 2313.45,2985 ; S8.1@2272.12,2967.88 cw(c2313.45,2926.55) 2313.45,2985 ; S8.1@2272.12,2967.88 cw(c2313.45,2926.55) 2313.45,2985 ; S8.1@2272.12,2967.88 cw(c2313.45,2926.55) 2313.45,2985 ; S8.1@2272.12,2967.88 cw(c2313.45,2926.55) 2313.45,2985 ; S8.1@2272.12,2967.88 cw(c2313.45,2926.55) 2313.45,2985 ; S8.1@2272.12,2967.88 cw(c2313.45,2926.55) 2313.45,2985 ; S8.1@2272.12,3002.12 ccw(c2313.45,3043.45) 2313.45,2985 ; S8.1@2272.12,3002.12 ccw(c2313.45,3043.45) 2313.45,2985 ; S8.1@2272.12,3002.12 ccw(c2313.45,3043.45) 2313.45,2985 ; S8.1@2272.12,3002.12 ccw(c2313.45,3043.45) 2313.45,2985 ; S8.1@2272.12,3002.12 ccw(c2313.45,3043.45) 2313.45,2985 ; S8.1@2272.12,3002.12 ccw(c2313.45,3043.45) 2313.45,2985 ; S8.1@2272.12,3002.12 ccw(c2313.45,3043.45) 2313.45,2985 ; S8.1@2272.12,3002.12 ccw(c2313.45,3043.45) 2313.45,2985 ; S5.1@2274.19,3690.81 cw(c2308.45,3656.55) 2308.45,3705 ; S5.1@2274.19,3690.81 cw(c2308.45,3656.55) 2308.45,3705 ; S5.1@2274.19,3690.81 cw(c2308.45,3656.55) 2308.45,3705 ; S5.1@2274.19,3690.81 cw(c2308.45,3656.55) 2308.45,3705 ; S5.1@2274.19,3690.81 cw(c2308.45,3656.55) 2308.45,3705 ; S5.1@2274.19,3690.81 cw(c2308.45,3656.55) 2308.45,3705 ; S5.1@2274.19,3690.81 cw(c2308.45,3656.55) 2308.45,3705 ; S5.1@2274.19,3690.81 cw(c2308.45,3656.55) 2308.45,3705 ; S5.1@2274.19,3739.19 ccw(c2356.74,3821.74) 2356.74,3705 ; S5.1@2274.19,3739.19 ccw(c2356.74,3821.74) 2356.74,3705 ; S5.1@2274.19,3739.19 ccw(c2356.74,3821.74) 2356.74,3705 ; S5.1@2274.19,3739.19 ccw(c2356.74,3821.74) 2356.74,3705 ; S5.1@2274.19,3739.19 ccw(c2356.74,3821.74) 2356.74,3705 ; S5.1@2274.19,3739.19 ccw(c2356.74,3821.74) 2356.74,3705 ; S5.1@2274.19,3739.19 ccw(c2356.74,3821.74) 2356.74,3705 ; S5.1@2274.19,3739.19 ccw(c2356.74,3821.74) 2356.74,3705 ; S8.1@2279.19,2960.81 cw(c2337.6,2902.4) 2337.6,2985 ; S8.1@2279.19,2960.81 cw(c2337.6,2902.4) 2337.6,2985 ; S8.1@2279.19,2960.81 cw(c2337.6,2902.4) 2337.6,2985 ; S8.1@2279.19,2960.81 cw(c2337.6,2902.4) 2337.6,2985 ; S8.1@2279.19,2960.81 cw(c2337.6,2902.4) 2337.6,2985 ; S8.1@2279.19,2960.81 cw(c2337.6,2902.4) 2337.6,2985 ; S8.1@2279.19,2960.81 cw(c2337.6,2902.4) 2337.6,2985 ; S8.1@2279.19,2960.81 cw(c2337.6,2902.4) 2337.6,2985 ; S8.1@2279.19,3009.19 ccw(c2337.6,3067.6) 2337.6,2985 ; S8.1@2279.19,3009.19 ccw(c2337.6,3067.6) 2337.6,2985 ; S8.1@2279.19,3009.19 ccw(c2337.6,3067.6) 2337.6,2985 ; S8.1@2279.19,3009.19 ccw(c2337.6,3067.6) 2337.6,2985 ; S8.1@2279.19,3009.19 ccw(c2337.6,3067.6) 2337.6,2985 ; S8.1@2279.19,3009.19 ccw(c2337.6,3067.6) 2337.6,2985 ; S8.1@2279.19,3009.19 ccw(c2337.6,3067.6) 2337.6,2985 ; S8.1@2279.19,3009.19 ccw(c2337.6,3067.6) 2337.6,2985 ; S5.1@2281.26,3683.74 cw(c2332.6,3632.4) 2332.6,3705 ; S5.1@2281.26,3683.74 cw(c2332.6,3632.4) 2332.6,3705 ; S5.1@2281.26,3683.74 cw(c2332.6,3632.4) 2332.6,3705 ; S5.1@2281.26,3683.74 cw(c2332.6,3632.4) 2332.6,3705 ; S5.1@2281.26,3683.74 cw(c2332.6,3632.4) 2332.6,3705 ; S5.1@2281.26,3683.74 cw(c2332.6,3632.4) 2332.6,3705 ; S5.1@2281.26,3683.74 cw(c2332.6,3632.4) 2332.6,3705 ; S5.1@2281.26,3683.74 cw(c2332.6,3632.4) 2332.6,3705 ; S5.1@2281.26,3746.26 ccw(c2380.88,3845.88) 2380.88,3705 ; S5.1@2281.26,3746.26 ccw(c2380.88,3845.88) 2380.88,3705 ; S5.1@2281.26,3746.26 ccw(c2380.88,3845.88) 2380.88,3705 ; S5.1@2281.26,3746.26 ccw(c2380.88,3845.88) 2380.88,3705 ; S5.1@2281.26,3746.26 ccw(c2380.88,3845.88) 2380.88,3705 ; S5.1@2281.26,3746.26 ccw(c2380.88,3845.88) 2380.88,3705 ; S5.1@2281.26,3746.26 ccw(c2380.88,3845.88) 2380.88,3705 ; S5.1@2281.26,3746.26 ccw(c2380.88,3845.88) 2380.88,3705 ; S8.1@2286.26,2953.74 cw(c2361.74,2878.26) 2361.74,2985 ; S8.1@2286.26,2953.74 cw(c2361.74,2878.26) 2361.74,2985 ; S8.1@2286.26,2953.74 cw(c2361.74,2878.26) 2361.74,2985 ; S8.1@2286.26,2953.74 cw(c2361.74,2878.26) 2361.74,2985 ; S8.1@2286.26,2953.74 cw(c2361.74,2878.26) 2361.74,2985 ; S8.1@2286.26,2953.74 cw(c2361.74,2878.26) 2361.74,2985 ; S8.1@2286.26,2953.74 cw(c2361.74,2878.26) 2361.74,2985 ; S8.1@2286.26,2953.74 cw(c2361.74,2878.26) 2361.74,2985 ; S8.1@2286.26,3016.26 ccw(c2361.74,3091.74) 2361.74,2985 ; S8.1@2286.26,3016.26 ccw(c2361.74,3091.74) 2361.74,2985 ; S8.1@2286.26,3016.26 ccw(c2361.74,3091.74) 2361.74,2985 ; S8.1@2286.26,3016.26 ccw(c2361.74,3091.74) 2361.74,2985 ; S8.1@2286.26,3016.26 ccw(c2361.74,3091.74) 2361.74,2985 ; S8.1@2286.26,3016.26 ccw(c2361.74,3091.74) 2361.74,2985 ; S8.1@2286.26,3016.26 ccw(c2361.74,3091.74) 2361.74,2985 ; S8.1@2286.26,3016.26 ccw(c2361.74,3091.74) 2361.74,2985 ; 2813.26,3705 cw(c2813.26,3598.26) S6.1@2888.74,3673.74 ; 2813.26,3705 ccw(c2813.26,3811.74) S6.1@2888.74,3736.26 ; 2813.26,3705 ccw(c2813.26,3811.74) S6.1@2888.74,3736.26 ; 2813.26,3705 cw(c2813.26,3598.26) S6.1@2888.74,3673.74 ; 2813.26,3705 ccw(c2813.26,3811.74) S6.1@2888.74,3736.26 ; 2813.26,3705 cw(c2813.26,3598.26) S6.1@2888.74,3673.74 ; 2813.26,3705 ccw(c2813.26,3811.74) S6.1@2888.74,3736.26 ; 2813.26,3705 cw(c2813.26,3598.26) S6.1@2888.74,3673.74 ; 2823.26,2985 cw(c2823.26,2878.26) S9.1@2898.74,2953.74 ; 2823.26,2985 ccw(c2823.26,3091.74) S9.1@2898.74,3016.26 ; 2823.26,2985 ccw(c2823.26,3091.74) S9.1@2898.74,3016.26 ; 2823.26,2985 cw(c2823.26,2878.26) S9.1@2898.74,2953.74 ; 2823.26,2985 ccw(c2823.26,3091.74) S9.1@2898.74,3016.26 ; 2823.26,2985 cw(c2823.26,2878.26) S9.1@2898.74,2953.74 ; 2823.26,2985 ccw(c2823.26,3091.74) S9.1@2898.74,3016.26 ; 2823.26,2985 cw(c2823.26,2878.26) S9.1@2898.74,2953.74 ; 2823.26,2985 ccw(c2823.26,3091.74) S9.1@2898.74,3016.26 ; 2823.26,2985 cw(c2823.26,2878.26) S9.1@2898.74,2953.74 ; 2823.26,2985 ccw(c2823.26,3091.74) S9.1@2898.74,3016.26 ; 2823.26,2985 cw(c2823.26,2878.26) S9.1@2898.74,2953.74 ; 2823.26,2985 ccw(c2823.26,3091.74) S9.1@2898.74,3016.26 ; 2823.26,2985 cw(c2823.26,2878.26) S9.1@2898.74,2953.74 ; 2823.26,2985 ccw(c2823.26,3091.74) S9.1@2898.74,3016.26 ; 2823.26,2985 cw(c2823.26,2878.26) S9.1@2898.74,2953.74 ; 2837.4,3705 cw(c2837.4,3622.4) S6.1@2895.81,3680.81 ; 2837.4,3705 ccw(c2837.4,3787.6) S6.1@2895.81,3729.19 ; 2837.4,3705 ccw(c2837.4,3787.6) S6.1@2895.81,3729.19 ; 2837.4,3705 cw(c2837.4,3622.4) S6.1@2895.81,3680.81 ; 2837.4,3705 ccw(c2837.4,3787.6) S6.1@2895.81,3729.19 ; 2837.4,3705 cw(c2837.4,3622.4) S6.1@2895.81,3680.81 ; 2837.4,3705 ccw(c2837.4,3787.6) S6.1@2895.81,3729.19 ; 2837.4,3705 cw(c2837.4,3622.4) S6.1@2895.81,3680.81 ; 2847.4,2985 cw(c2847.4,2902.4) S9.1@2905.81,2960.81 ; 2847.4,2985 ccw(c2847.4,3067.6) S9.1@2905.81,3009.19 ; 2847.4,2985 ccw(c2847.4,3067.6) S9.1@2905.81,3009.19 ; 2847.4,2985 cw(c2847.4,2902.4) S9.1@2905.81,2960.81 ; 2847.4,2985 ccw(c2847.4,3067.6) S9.1@2905.81,3009.19 ; 2847.4,2985 cw(c2847.4,2902.4) S9.1@2905.81,2960.81 ; 2847.4,2985 ccw(c2847.4,3067.6) S9.1@2905.81,3009.19 ; 2847.4,2985 cw(c2847.4,2902.4) S9.1@2905.81,2960.81 ; 2847.4,2985 ccw(c2847.4,3067.6) S9.1@2905.81,3009.19 ; 2847.4,2985 cw(c2847.4,2902.4) S9.1@2905.81,2960.81 ; 2847.4,2985 ccw(c2847.4,3067.6) S9.1@2905.81,3009.19 ; 2847.4,2985 cw(c2847.4,2902.4) S9.1@2905.81,2960.81 ; 2847.4,2985 ccw(c2847.4,3067.6) S9.1@2905.81,3009.19 ; 2847.4,2985 cw(c2847.4,2902.4) S9.1@2905.81,2960.81 ; 2847.4,2985 ccw(c2847.4,3067.6) S9.1@2905.81,3009.19 ; 2847.4,2985 cw(c2847.4,2902.4) S9.1@2905.81,2960.81 ; 2861.55,3705 cw(c2861.55,3646.55) S6.1@2902.88,3687.88 ; 2861.55,3705 ccw(c2861.55,3763.45) S6.1@2902.88,3722.12 ; 2861.55,3705 ccw(c2861.55,3763.45) S6.1@2902.88,3722.12 ; 2861.55,3705 cw(c2861.55,3646.55) S6.1@2902.88,3687.88 ; 2861.55,3705 ccw(c2861.55,3763.45) S6.1@2902.88,3722.12 ; 2861.55,3705 cw(c2861.55,3646.55) S6.1@2902.88,3687.88 ; 2861.55,3705 ccw(c2861.55,3763.45) S6.1@2902.88,3722.12 ; 2861.55,3705 cw(c2861.55,3646.55) S6.1@2902.88,3687.88 ; 2871.55,2985 cw(c2871.55,2926.55) S9.1@2912.88,2967.88 ; 2871.55,2985 ccw(c2871.55,3043.45) S9.1@2912.88,3002.12 ; 2871.55,2985 ccw(c2871.55,3043.45) S9.1@2912.88,3002.12 ; 2871.55,2985 cw(c2871.55,2926.55) S9.1@2912.88,2967.88 ; 2871.55,2985 ccw(c2871.55,3043.45) S9.1@2912.88,3002.12 ; 2871.55,2985 cw(c2871.55,2926.55) S9.1@2912.88,2967.88 ; 2871.55,2985 ccw(c2871.55,3043.45) S9.1@2912.88,3002.12 ; 2871.55,2985 cw(c2871.55,2926.55) S9.1@2912.88,2967.88 ; 2871.55,2985 ccw(c2871.55,3043.45) S9.1@2912.88,3002.12 ; 2871.55,2985 cw(c2871.55,2926.55) S9.1@2912.88,2967.88 ; 2871.55,2985 ccw(c2871.55,3043.45) S9.1@2912.88,3002.12 ; 2871.55,2985 cw(c2871.55,2926.55) S9.1@2912.88,2967.88 ; 2871.55,2985 ccw(c2871.55,3043.45) S9.1@2912.88,3002.12 ; 2871.55,2985 cw(c2871.55,2926.55) S9.1@2912.88,2967.88 ; 2871.55,2985 ccw(c2871.55,3043.45) S9.1@2912.88,3002.12 ; 2871.55,2985 cw(c2871.55,2926.55) S9.1@2912.88,2967.88 ; S6.1@2888.74,3673.74 cw(c2813.26,3598.26) 2920,3598.26 ; S6.1@2888.74,3673.74 cw(c2813.26,3598.26) 2920,3598.26 ; S6.1@2888.74,3673.74 cw(c2813.26,3598.26) 2920,3598.26 ; S6.1@2888.74,3673.74 cw(c2813.26,3598.26) 2920,3598.26 ; S6.1@2895.81,3680.81 cw(c2837.4,3622.4) 2920,3622.4 ; S6.1@2895.81,3680.81 cw(c2837.4,3622.4) 2920,3622.4 ; S6.1@2895.81,3680.81 cw(c2837.4,3622.4) 2920,3622.4 ; S6.1@2895.81,3680.81 cw(c2837.4,3622.4) 2920,3622.4 ; S9.1@2898.74,3016.26 ccw(c2847.4,3067.6) 2920,3067.6 ; S9.1@2898.74,3016.26 ccw(c2847.4,3067.6) 2920,3067.6 ; S9.1@2898.74,3016.26 ccw(c2847.4,3067.6) 2920,3067.6 ; S9.1@2898.74,3016.26 ccw(c2847.4,3067.6) 2920,3067.6 ; S9.1@2898.74,3016.26 ccw(c2847.4,3067.6) 2920,3067.6 ; S9.1@2898.74,3016.26 ccw(c2847.4,3067.6) 2920,3067.6 ; S9.1@2898.74,3016.26 ccw(c2847.4,3067.6) 2920,3067.6 ; S9.1@2898.74,3016.26 ccw(c2847.4,3067.6) 2920,3067.6 ; S6.1@2902.88,3687.88 cw(c2861.55,3646.55) 2920,3646.55 ; S6.1@2902.88,3687.88 cw(c2861.55,3646.55) 2920,3646.55 ; S6.1@2902.88,3687.88 cw(c2861.55,3646.55) 2920,3646.55 ; S6.1@2902.88,3687.88 cw(c2861.55,3646.55) 2920,3646.55 ; S9.1@2905.81,3009.19 ccw(c2871.55,3043.45) 2920,3043.45 ; S9.1@2905.81,3009.19 ccw(c2871.55,3043.45) 2920,3043.45 ; S9.1@2905.81,3009.19 ccw(c2871.55,3043.45) 2920,3043.45 ; S9.1@2905.81,3009.19 ccw(c2871.55,3043.45) 2920,3043.45 ; S9.1@2905.81,3009.19 ccw(c2871.55,3043.45) 2920,3043.45 ; S9.1@2905.81,3009.19 ccw(c2871.55,3043.45) 2920,3043.45 ; S9.1@2905.81,3009.19 ccw(c2871.55,3043.45) 2920,3043.45 ; S9.1@2905.81,3009.19 ccw(c2871.55,3043.45) 2920,3043.45 ; 2920,3043.45 ccw(c2988.45,3043.45) S9.1@2940.05,2995.05 ; 2920,3043.45 ccw(c2988.45,3043.45) S9.1@2940.05,2995.05 ; 2920,3043.45 ccw(c2988.45,3043.45) S9.1@2940.05,2995.05 ; 2920,3043.45 ccw(c2988.45,3043.45) S9.1@2940.05,2995.05 ; 2920,3043.45 ccw(c2988.45,3043.45) S9.1@2940.05,2995.05 ; 2920,3043.45 ccw(c2988.45,3043.45) S9.1@2940.05,2995.05 ; 2920,3043.45 ccw(c2988.45,3043.45) S9.1@2940.05,2995.05 ; 2920,3043.45 ccw(c2988.45,3043.45) S9.1@2940.05,2995.05 ; 2920,3067.6 ccw(c3012.6,3067.6) S9.1@2947.12,3002.12 ; 2920,3067.6 ccw(c3012.6,3067.6) S9.1@2947.12,3002.12 ; 2920,3067.6 ccw(c3012.6,3067.6) S9.1@2947.12,3002.12 ; 2920,3067.6 ccw(c3012.6,3067.6) S9.1@2947.12,3002.12 ; 2920,3067.6 ccw(c3012.6,3067.6) S9.1@2947.12,3002.12 ; 2920,3067.6 ccw(c3012.6,3067.6) S9.1@2947.12,3002.12 ; 2920,3067.6 ccw(c3012.6,3067.6) S9.1@2947.12,3002.12 ; 2920,3067.6 ccw(c3012.6,3067.6) S9.1@2947.12,3002.12 ; 2920,3091.74 ccw(c3036.74,3091.74) S9.1@2954.19,3009.19 ; 2920,3091.74 ccw(c3036.74,3091.74) S9.1@2954.19,3009.19 ; 2920,3091.74 ccw(c3036.74,3091.74) S9.1@2954.19,3009.19 ; 2920,3091.74 ccw(c3036.74,3091.74) S9.1@2954.19,3009.19 ; 2920,3091.74 ccw(c3036.74,3091.74) S9.1@2954.19,3009.19 ; 2920,3091.74 ccw(c3036.74,3091.74) S9.1@2954.19,3009.19 ; 2920,3091.74 ccw(c3036.74,3091.74) S9.1@2954.19,3009.19 ; 2920,3091.74 ccw(c3036.74,3091.74) S9.1@2954.19,3009.19 ; 2920,3115.88 ccw(c3060.88,3115.88) S9.1@2961.26,3016.26 ; 2920,3115.88 ccw(c3060.88,3115.88) S9.1@2961.26,3016.26 ; 2920,3115.88 ccw(c3060.88,3115.88) S9.1@2961.26,3016.26 ; 2920,3115.88 ccw(c3060.88,3115.88) S9.1@2961.26,3016.26 ; 2920,3115.88 ccw(c3060.88,3115.88) S9.1@2961.26,3016.26 ; 2920,3115.88 ccw(c3060.88,3115.88) S9.1@2961.26,3016.26 ; 2920,3115.88 ccw(c3060.88,3115.88) S9.1@2961.26,3016.26 ; 2920,3115.88 ccw(c3060.88,3115.88) S9.1@2961.26,3016.26 ; 2920,3598.26 cw(c3026.74,3598.26) S6.1@2951.26,3673.74 ; 2920,3598.26 cw(c3026.74,3598.26) S6.1@2951.26,3673.74 ; 2920,3598.26 cw(c3026.74,3598.26) S6.1@2951.26,3673.74 ; 2920,3598.26 cw(c3026.74,3598.26) S6.1@2951.26,3673.74 ; 2920,3622.4 cw(c3002.6,3622.4) S6.1@2944.19,3680.81 ; 2920,3622.4 cw(c3002.6,3622.4) S6.1@2944.19,3680.81 ; 2920,3622.4 cw(c3002.6,3622.4) S6.1@2944.19,3680.81 ; 2920,3622.4 cw(c3002.6,3622.4) S6.1@2944.19,3680.81 ; 2920,3646.55 cw(c2978.45,3646.55) S6.1@2937.12,3687.88 ; 2920,3646.55 cw(c2978.45,3646.55) S6.1@2937.12,3687.88 ; 2920,3646.55 cw(c2978.45,3646.55) S6.1@2937.12,3687.88 ; 2920,3646.55 cw(c2978.45,3646.55) S6.1@2937.12,3687.88
  Bottom Layer w20: v2(3115,3900) 3155,3900 R14.1@3268,4013